# Altium PCB FPGA_Tester_Board.PcbDoc
Units mm, origin at the board's own origin, x right, y up, seen from the top; angles counter-clockwise.
Board outline 77 x 109 mm, 8 copper layers (Top Layer, Signal Layer 1, Signal Layer 2, Signal Layer 3, Signal Layer 4, Signal Layer 5, Signal Layer 6, Bottom Layer), stack 1.684 mm thick; 29 components, 84 nets, 252 pads, 29 vias.
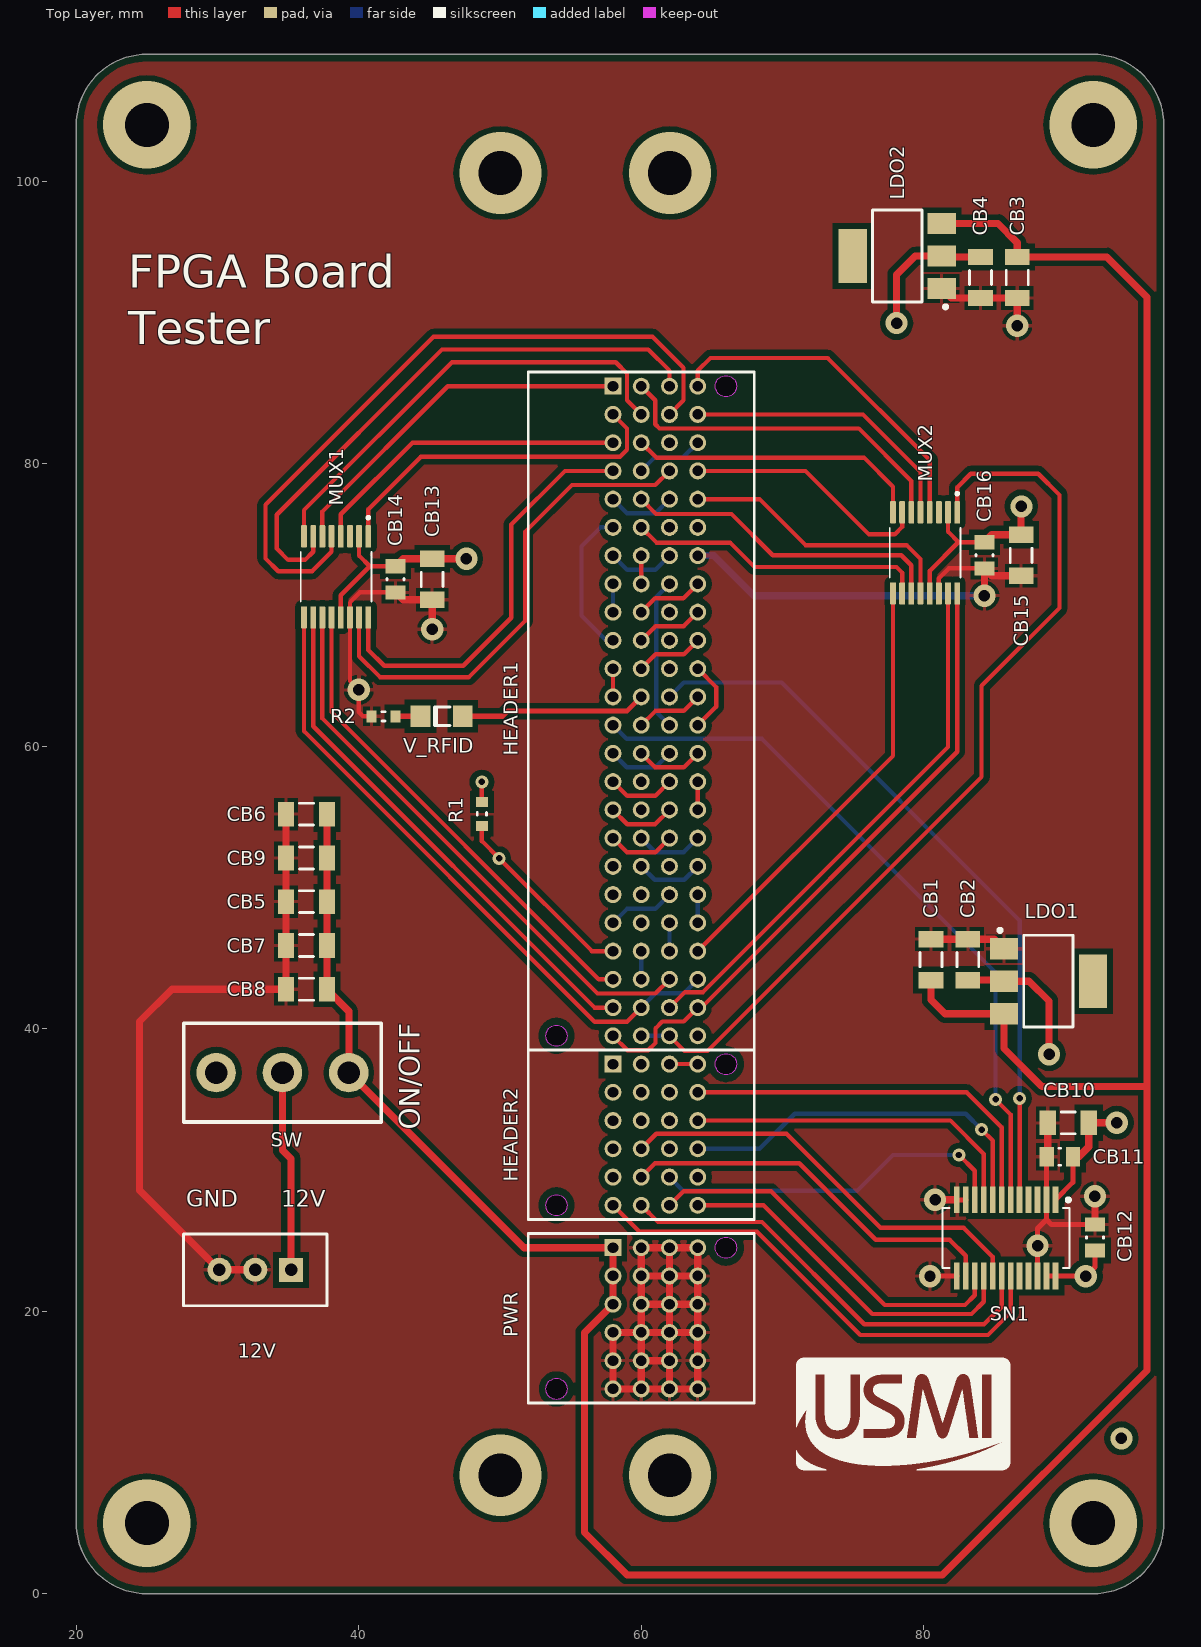
[diagram p0: Top Layer view]
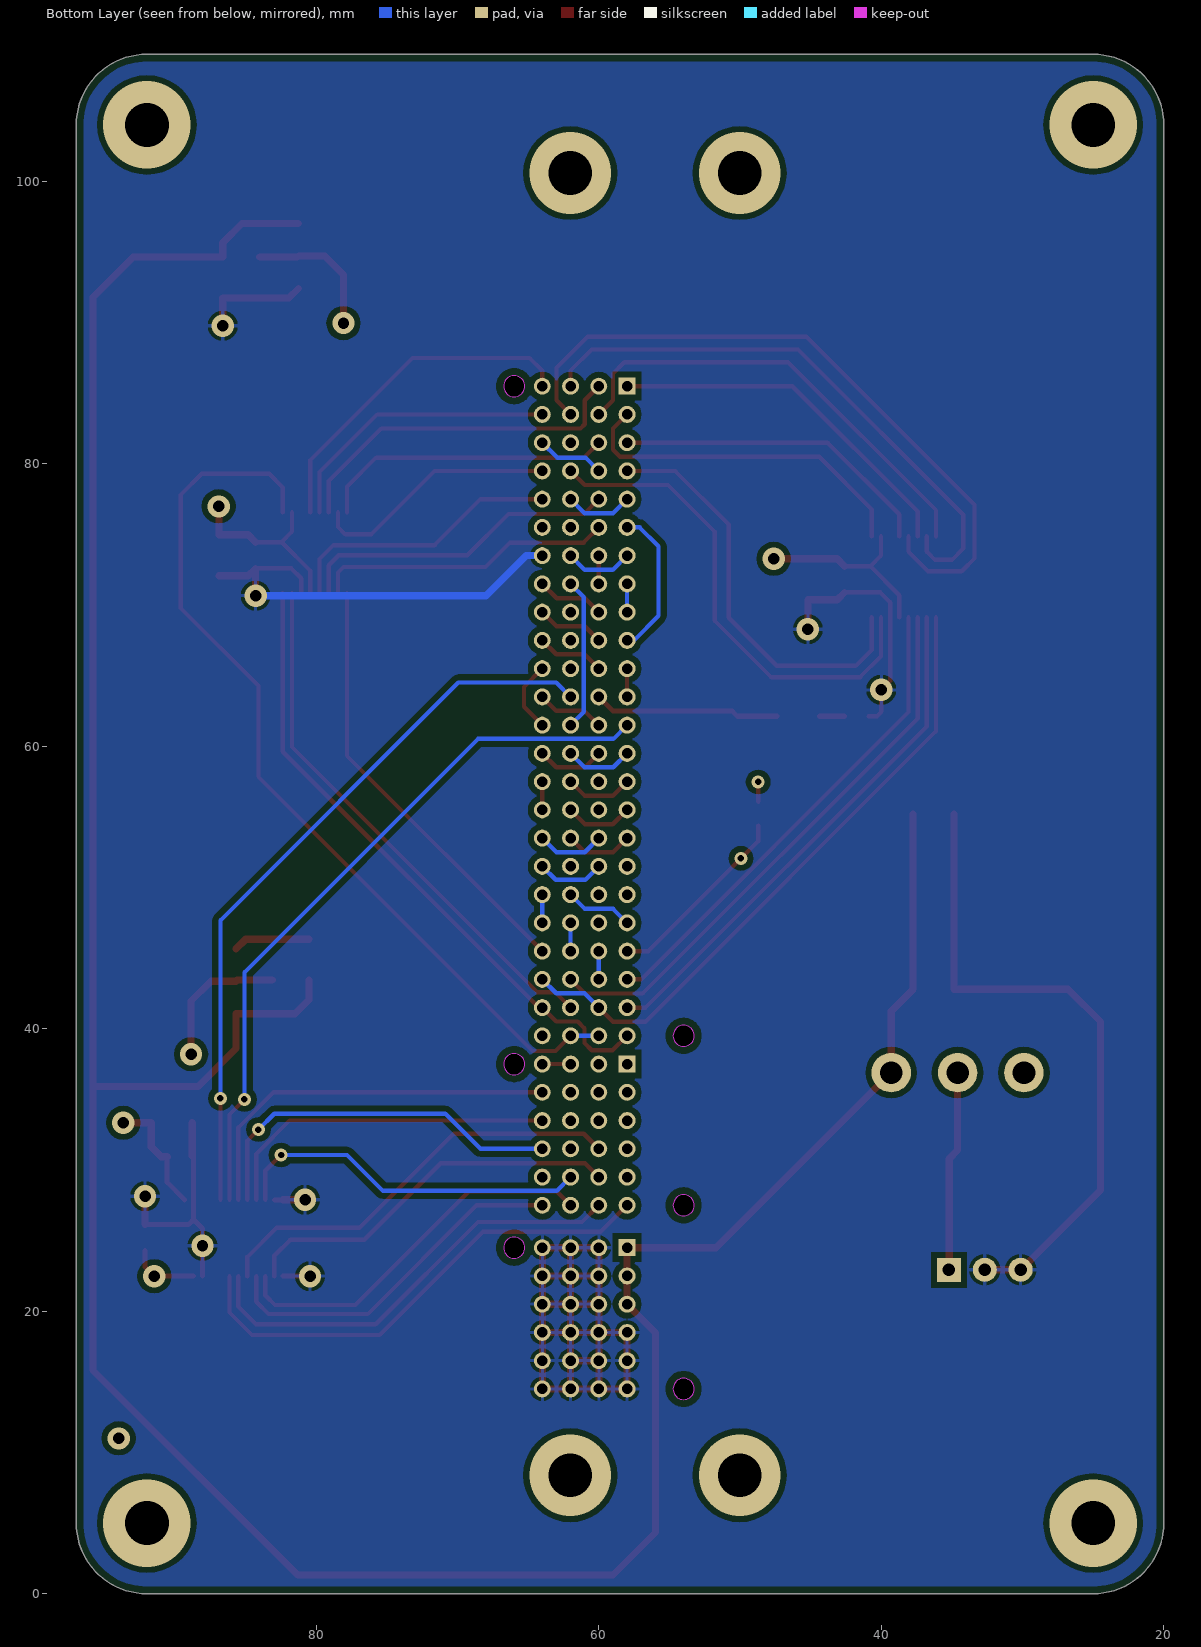
[diagram p1: Bottom Layer view, seen from below]
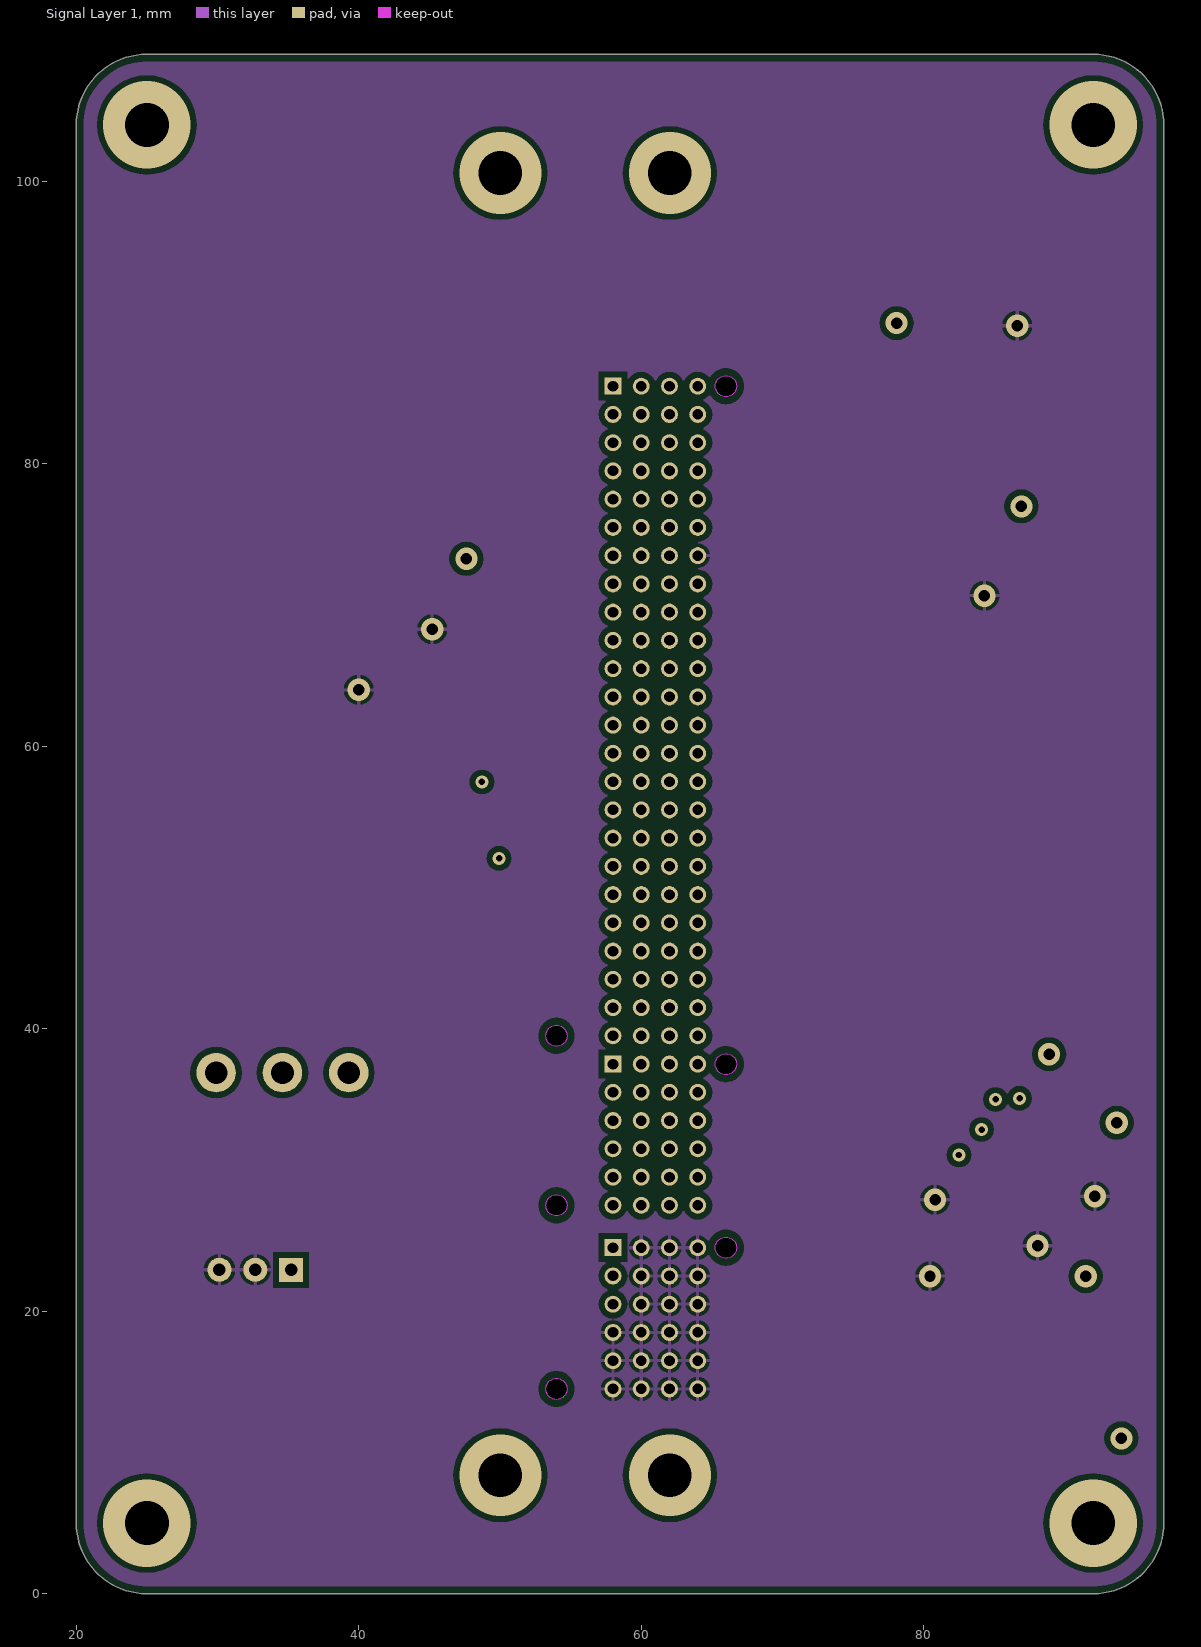
[diagram p2: Signal Layer 1]
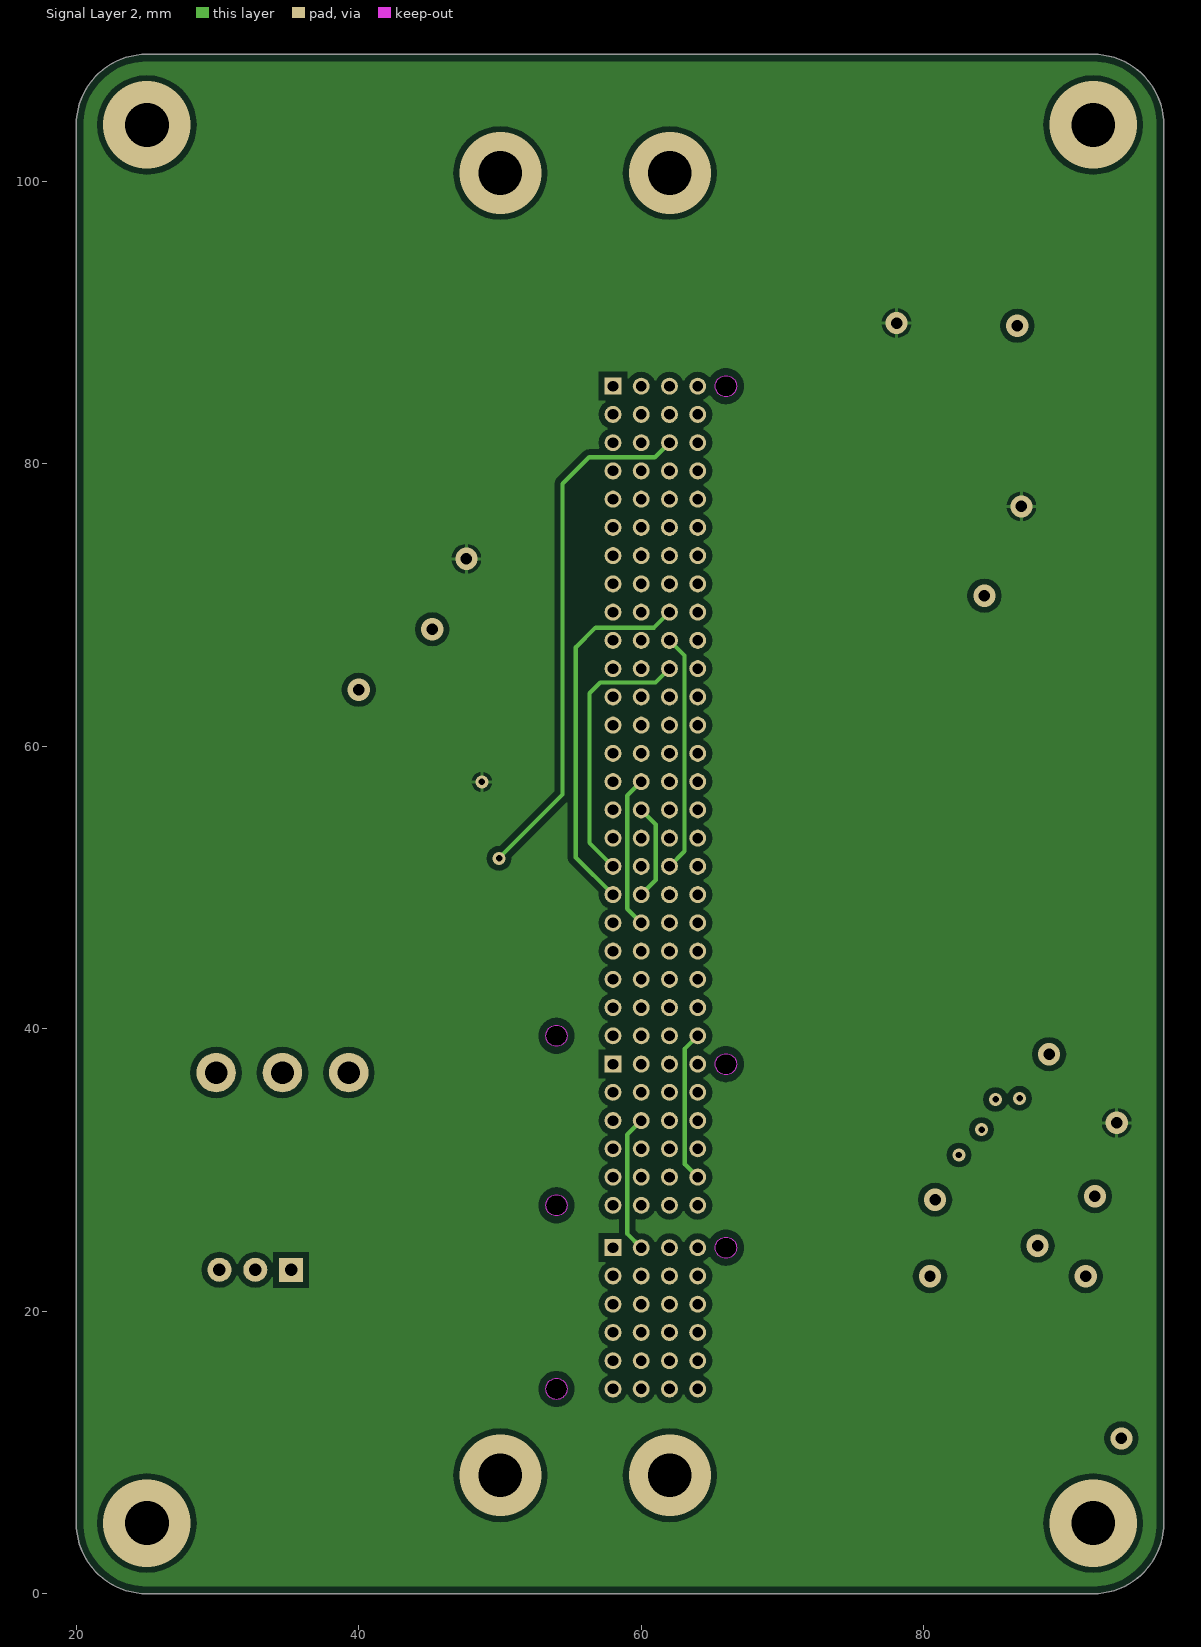
[diagram p3: Signal Layer 2]
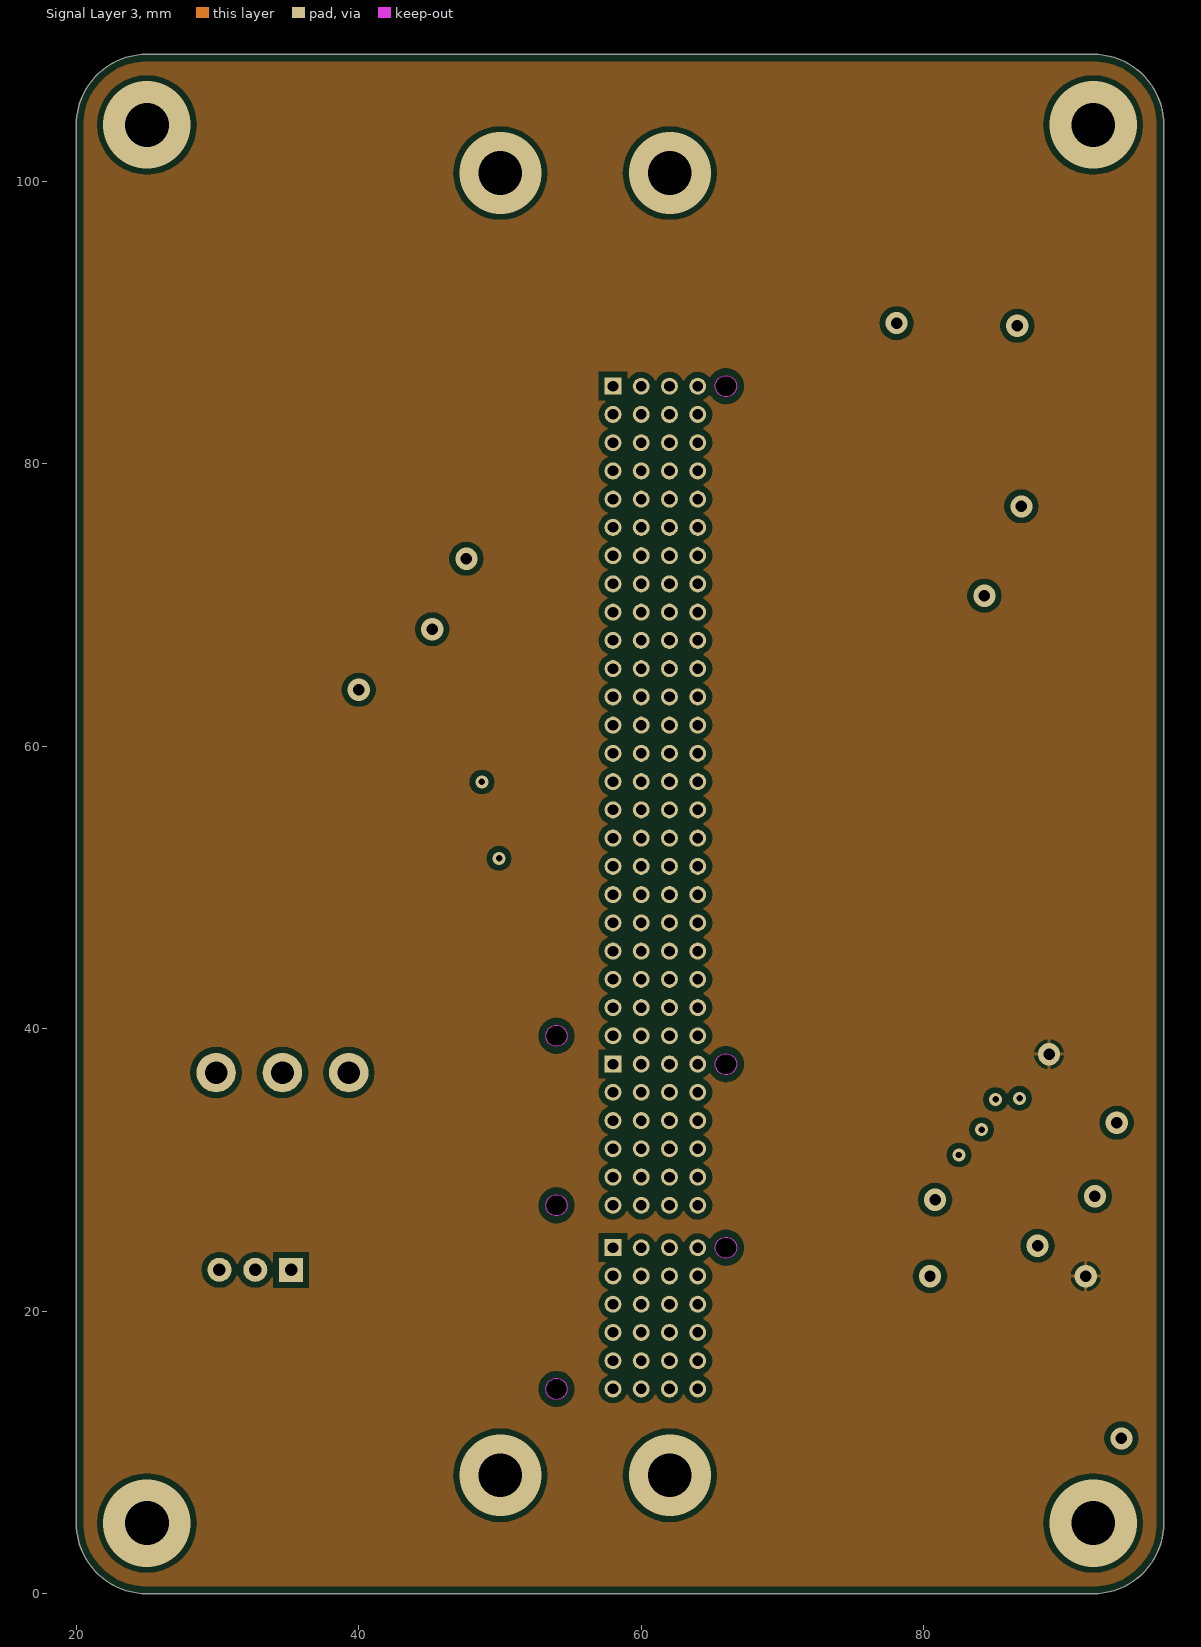
[diagram p4: Signal Layer 3]
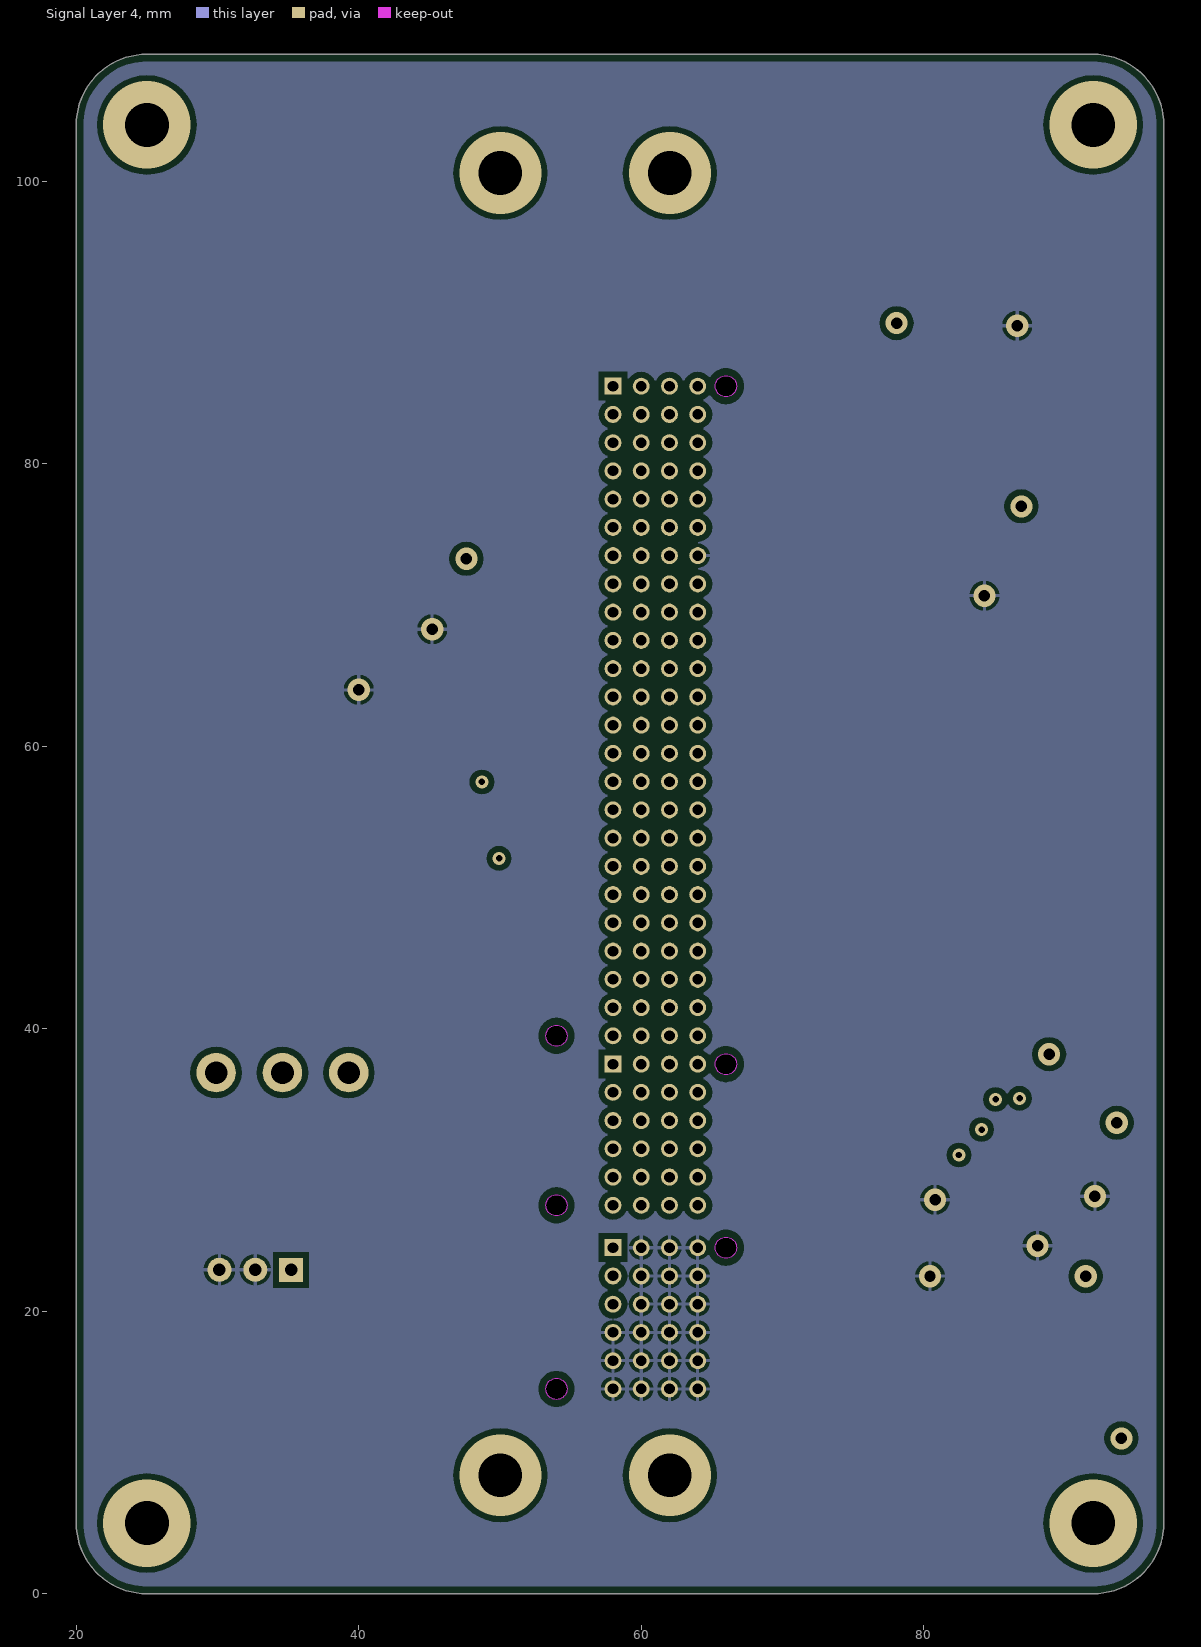
[diagram p5: Signal Layer 4]

## Layer stack, top to bottom
Top Solder: solder mask 0.0102, Solder Resist, Dk 3.5
Top Layer: signal copper 0.0356
Dielectric 1: core 0.254, FR-4, Dk 4.2
Signal Layer 1: signal copper 0.036
Dielectric 3: prepreg 0.127, Dk 4.2
Signal Layer 2: signal copper 0.036
Dielectric 4: core 0.254, Dk 4.2
Signal Layer 3: signal copper 0.036
Dielectric 5: prepreg 0.127, Dk 4.2
Signal Layer 4: signal copper 0.036
Dielectric 6: core 0.254, Dk 4.2
Signal Layer 5: signal copper 0.036
Dielectric 7: prepreg 0.127, Dk 4.2
Signal Layer 6: signal copper 0.036
Dielectric 2: core 0.254, Dk 4.2
Bottom Layer: signal copper 0.0356
Bottom Solder: solder mask 0.0102, Solder Resist, Dk 3.5

## Board outline
20,5 ccw(c25,5) 25,0 92,0 ccw(c92,5) 97,5 97,104 ccw(c92,104) 92,109 25,109 ccw(c25,104) 20,104

## Design rules (kind name [scope] priority, off if disabled: settings)
BoardOutlineClearance [All] p1: gap=0.508
Clearance [All] p1: gap=0.152 except(0.406: Arc-Poly Track-Poly SMDPad-Poly THPad-Poly Via-Poly Fill-Poly Poly-Poly)
HoleSize [All] p1: absolutevalues=TRUE maxlimit=3.5 minlimit=0.025 maxpercent=80.000 minpercent=20.000
MinimumSolderMaskSliver [All] p1: minsoldermaskwidth=0.034
PolygonConnect [All] p1: connectstyle=Relief reliefconductorwidth=0.254 reliefentries=4 polygonreliefangle="90 Angle" airgapwidth=0.254
RoomDefinition U_12V_to_5V_1A_LR_Sheet [InComponentClass('U_12V_to_5V_1A_LR_Sheet')] p1: confinementstyle=ConfineIn formatcopy=TRUE lockcomponents=FALSE outline 89.306,98.72 73.123,98.72 73.123,89.22 89.306,89.22
RoomDefinition U_12V_to_3_3V_1A_LR_Sheet [InComponentClass('U_12V_to_3_3V_1A_LR_Sheet')] p2: confinementstyle=ConfineIn formatcopy=TRUE lockcomponents=FALSE outline 77.826,39.37 93.831,39.37 93.831,48.26 77.826,48.26
RoomDefinition U_3V3_to_5V_8_bit_Logic_Converter [InComponentClass('U_3V3_to_5V_8_bit_Logic_Converter')] p3: confinementstyle=ConfineIn formatcopy=TRUE lockcomponents=FALSE outline 79.839,37.084 79.839,20.189 93.839,20.189 93.839,37.084
RoomDefinition MUX_8_TO_1_2 [InComponentClass('MUX_8_TO_1_2')] p4: confinementstyle=ConfineIn formatcopy=TRUE lockcomponents=FALSE outline 89.8,82.925 77.1,82.925 77.1,66.7 89.8,66.7
RoomDefinition MUX_8_TO_1_1 [InComponentClass('MUX_8_TO_1_1')] p5: confinementstyle=ConfineIn formatcopy=TRUE lockcomponents=FALSE outline 48.1,81.225 35.4,81.225 35.4,65 48.1,65
RoutingVias [All] p1: holewidth=0.457 width=0.914 viastyle="Through Hole" minholewidth=0.356 minwidth=0.813 maxholewidth=1.321 maxwidth=2.083
SilkToSolderMaskClearance [IsPad] p1: minsilkscreentomaskgap=0.1 clearancetoexposedcopper=TRUE
SolderMaskExpansion [All] p1: expansion=0.102
Width [All] p1: maxlimit=0.813 minlimit=0.254 preferedwidth=0.406
27 further rules are at their usual default settings.

## Classes and differential pairs
channel class Multiplexer_8_to_1: MUX_8_TO_1_1 MUX_8_TO_1_2
component class U_12V_to_5V_1A_LR_Sheet: CB3 CB4 LDO2
component class U_12V_to_3_3V_1A_LR_Sheet: CB1 CB2 LDO1
component class U_3V3_to_5V_8_bit_Logic_Converter: CB10 CB11 CB12 SN1
component class Power_Input: 12V CB5 CB6 CB7 CB8 CB9 PWR SW
component class MUX_8_TO_1_2: CB15 CB16 MUX2
component class MUX_8_TO_1_1: CB13 CB14 MUX1
component class FPGA_Tester_Board_Signals: HEADER1 HEADER2 R1 R2 V_RFID

## Components (designator, comment, footprint, x,y, rotation, side; value= is the part's Value field where it differs from the comment)
12V "Header 3" HDR1X3_12V 32.674,22.936 r180 top
CB1 "10uF" 1206c 80.523,44.895 r90 top
CB2 "10uF" 1206c 83.127,44.895 r90 top
CB3 "10uF" 1206c 86.627,93.195 r270 top (schematic designator CB1)
CB4 "10uF" 1206c 84.023,93.195 r270 top (schematic designator CB2)
CB5 "10uF" 1206c 36.296,49 r0 top
CB6 "10uF" 1206c 36.296,55.2 r0 top (schematic designator CB4)
CB7 "10uF" 1206c 36.296,45.9 r0 top (schematic designator CB1)
CB8 "10uF" 1206c 36.296,42.8 r0 top (schematic designator CB2)
CB9 "10uF" 1206c 36.296,52.1 r0 top (schematic designator CB3)
CB10 "10uF" 1206c 90.237,33.341 r0 top (schematic designator CB3)
CB11 "100nF" 0805c 89.637,30.937 r0 top (schematic designator CB1)
CB12 "100nF" 0805c 92.126,25.222 r270 top (schematic designator CB2)
CB13 "10uF" 1206c 45.2,71.825 r90 top (schematic designator CB3)
CB14 "100nF" 0805c 42.6,71.825 r90 top (schematic designator CB1)
CB15 "10uF" 1206c 86.9,73.525 r90 top (schematic designator CB3)
CB16 "100nF" 0805c 84.3,73.525 r90 top (schematic designator CB1)
HEADER1 "5536507-3" 5536501-3 58,85.5 r0 top locked
HEADER2 "5536507-1" 5536501-1 58,37.5 r0 top locked
LDO1 "NCP1117LPST33T3G" ONSC-SOT-223-4-318H-01_A_V 88.831,43.37 r0 top (schematic designator LDO)
LDO2 "LDL1117S50R" ONSC-SOT-223-4-318H-01_A_V 78.123,94.72 r180 top (schematic designator LDO)
MUX1 "TMUX1208PWR" SOP65P640X120-16N 38.4,72 r270 top (schematic designator MUX)
MUX2 "TMUX1208PWR" SOP65P640X120-16N 80.1,73.7 r270 top (schematic designator MUX)
PWR "5536623-1" 5536623-1 58,14.5 r0 top locked
R1 "2.2K" 0603R 48.717,55.22 r90 top
R2 "2.2K" 0603R 41.758,62.128 r0 top
SN1 "SN74LVC8T" DBQ24-M 85.839,25.189 r270 top (schematic designator SN74LV)
SW "SW" CS12ANW03 34.6,36.9 r180 top
V_RFID "RED" 1206_A 45.872,62.128 r0 top

## Footprints (in the part's own frame and the unit in brackets; to place one, negate y for a bottom-side part, rotate by r counter-clockwise, add the part's x,y. Pads: shape width x height; smd on the part's side, far side on the other; paste and mask are expansions set on the pad)
0603R [mm]
  rect 0.7x0.85 smd: 1(-0.85,0) 2(0.85,0)
  silkscreen extent -0.1,-0.33 0.1,0.33, body extent -0.8,-0.4 0.8,0.4, height 0.6
0805c [mm] "Chip Capacitor, 2-Leads, Body 2.00x1.25mm, IPC Medium Density"
  rect 1x1.4 smd: 1(-0.925,0) 2(0.925,0)
  silkscreen extent -0.05,-0.6 0.05,0.6, body extent -1,-0.63 1,0.63, height 1.35
1206_A [mm] "Chip LED, 2-Leads, Body 3.2x1.6mm, IPC Medium Density"
  rect 1.4x1.5 smd: 1(-1.5,0) 2(1.5,0)
  silkscreen extent -0.5,-0.66 0.6,0.65, body extent -1.6,-0.8 1.6,0.8, height 0.68
1206c [mm] "Chip Capacitor, 2-Leads, Body 3.20x1.60mm, IPC Medium Density"
  rect 1.15x1.75 smd: 1(-1.45,0) 2(1.45,0)
  silkscreen extent -0.5,-0.77 0.5,0.77, body extent -1.6,-0.8 1.6,0.8, height 1.4
5536501-1 [mm] "TE Z-Pack 5536501"
  rect 1.2x1.2 hole 0.75: 1(0,0)
  round 1.2 hole 0.75: 2(2,0) 3(4,0) 4(6,0) 5(0,-2) 6(2,-2) 7(4,-2) 8(6,-2) 9(0,-4) 10(2,-4) 11(4,-4) 12(6,-4) 13(0,-6) 14(2,-6) 15(4,-6) 16(6,-6) 17(0,-8) 18(2,-8) 19(4,-8) 20(6,-8) 21(0,-10) 22(2,-10) 23(4,-10) 24(6,-10)
  Keep-Out Layer board cut-out: 8,-0.75 7.713,-0.693 7.47,-0.53 7.307,-0.287 7.25,0 7.25,0 7.307,0.287 7.47,0.53 7.713,0.693 8,0.75 8,0.75 8.287,0.693 8.53,0.53 8.693,0.287 8.75,0 8.75,0 8.693,-0.287 8.53,-0.53 8.287,-0.693 8,-0.75
  Keep-Out Layer board cut-out: -4,-10.75 -4.287,-10.693 -4.53,-10.53 -4.693,-10.287 -4.75,-10 -4.75,-10 -4.693,-9.713 -4.53,-9.47 -4.287,-9.307 -4,-9.25 -4,-9.25 -3.713,-9.307 -3.47,-9.47 -3.307,-9.713 -3.25,-10 -3.25,-10 -3.307,-10.287 -3.47,-10.53 -3.713,-10.693 -4,-10.75
  silkscreen extent -6,-11 10,1, body extent -5.75,-10.94 10.05,0.94, height 17
5536501-3 [mm] "TE Z-Pack 5536501-3"
  rect 1.2x1.2 hole 0.75: 1(0,0)
  round 1.2 hole 0.75: 2(2,0) 3(4,0) 4(6,0) 5(0,-2) 6(2,-2) 7(4,-2) 8(6,-2) 9(0,-4) 10(2,-4) 11(4,-4) 12(6,-4) 13(0,-6) 14(2,-6) 15(4,-6) 16(6,-6) 17(0,-8) 18(2,-8) 19(4,-8) 20(6,-8) 21(0,-10) 22(2,-10) 23(4,-10) 24(6,-10) 25(0,-12) 26(2,-12) 27(4,-12) 28(6,-12) 29(0,-14) 30(2,-14) 31(4,-14) 32(6,-14) 33(0,-16) 34(2,-16) 35(4,-16) 36(6,-16) 37(0,-18) 38(2,-18) 39(4,-18) 40(6,-18) 41(0,-20) 42(2,-20) 43(4,-20) 44(6,-20) 45(0,-22) 46(2,-22) 47(4,-22) 48(6,-22) 49(0,-24) 50(2,-24) 51(4,-24) 52(6,-24) 53(0,-26) 54(2,-26) 55(4,-26) 56(6,-26) 57(0,-28) 58(2,-28) 59(4,-28) 60(6,-28) 61(0,-30) 62(2,-30) 63(4,-30) 64(6,-30) 65(0,-32) 66(2,-32) 67(4,-32) 68(6,-32) 69(0,-34) 70(2,-34) 71(4,-34) 72(6,-34) 73(0,-36) 74(2,-36) 75(4,-36) 76(6,-36) 77(0,-38) 78(2,-38) 79(4,-38) 80(6,-38) 81(0,-40) 82(2,-40) 83(4,-40) 84(6,-40) 85(0,-42) 86(2,-42) 87(4,-42) 88(6,-42) 89(0,-44) 90(2,-44) 91(4,-44) 92(6,-44) 93(0,-46) 94(2,-46) 95(4,-46) 96(6,-46)
  Keep-Out Layer board cut-out: -4,-46.75 -4.287,-46.693 -4.53,-46.53 -4.693,-46.287 -4.75,-46 -4.75,-46 -4.693,-45.713 -4.53,-45.47 -4.287,-45.307 -4,-45.25 -4,-45.25 -3.713,-45.307 -3.47,-45.47 -3.307,-45.713 -3.25,-46 -3.25,-46 -3.307,-46.287 -3.47,-46.53 -3.713,-46.693 -4,-46.75
  Keep-Out Layer board cut-out: 8,-0.75 7.713,-0.693 7.47,-0.53 7.307,-0.287 7.25,0 7.25,0 7.307,0.287 7.47,0.53 7.713,0.693 8,0.75 8,0.75 8.287,0.693 8.53,0.53 8.693,0.287 8.75,0 8.75,0 8.693,-0.287 8.53,-0.53 8.287,-0.693 8,-0.75
  silkscreen extent -6,-47 10,1, body extent -5.75,-46.94 10.05,0.94, height 17
5536623-1 [mm] "TE Z-Pack 5536623-1"
  round 1.2 hole 0.75: 1(0,6) 1(0,8) 2(2,6) 2(2,8) 2(2,10) 3(4,6) 3(4,8) 3(4,10) 4(6,6) 4(6,8) 4(6,10) 5(0,0) 5(0,2) 5(0,4) 6(2,0) 6(2,2) 6(2,4) 7(4,0) 7(4,2) 7(4,4) 8(6,0) 8(6,2) 8(6,4)
  rect 1.2x1.2 hole 0.75: 1(0,10)
  Keep-Out Layer board cut-out: -4,-0.75 -4.287,-0.693 -4.53,-0.53 -4.693,-0.287 -4.75,0 -4.75,0 -4.693,0.287 -4.53,0.53 -4.287,0.693 -4,0.75 -4,0.75 -3.713,0.693 -3.47,0.53 -3.307,0.287 -3.25,0 -3.25,0 -3.307,-0.287 -3.47,-0.53 -3.713,-0.693 -4,-0.75
  Keep-Out Layer board cut-out: 8,9.25 7.713,9.307 7.47,9.47 7.307,9.713 7.25,10 7.25,10 7.307,10.287 7.47,10.53 7.713,10.693 8,10.75 8,10.75 8.287,10.693 8.53,10.53 8.693,10.287 8.75,10 8.75,10 8.693,9.713 8.53,9.47 8.287,9.307 8,9.25
  silkscreen extent -6,-1 10,11, body extent -5.95,-0.92 9.9,10.96, height 17
CS12ANW03 [mm] "NKK Switches SPDT Switch"
  round 2.8 hole 1.6: 1(-4.7,0) 2(0,0) 3(4.7,0)
  silkscreen extent -7,-3.5 7,3.5
DBQ24-M [mil] "24-SSOP (0.154\", 3.90mm Width)"
  rect 75x16 smd paste+0 mask+0: 1(-106.5,137.5) 2(-106.5,112.5) 3(-106.5,87.5) 4(-106.5,62.5) 5(-106.5,37.5) 6(-106.5,12.5) 7(-106.5,-12.5) 8(-106.5,-37.5) 9(-106.5,-62.5) 10(-106.5,-87.5) 11(-106.5,-112.5) 12(-106.5,-137.5) 13(106.5,-137.5) 14(106.5,-112.5) 15(106.5,-87.5) 16(106.5,-62.5) 17(106.5,-37.5) 18(106.5,-12.5) 19(106.5,12.5) 20(106.5,37.5) 21(106.5,62.5) 22(106.5,87.5) 23(106.5,112.5) 24(106.5,137.5)
  silkscreen extent -110,-177 84,177, body extent -122,-172 122,172, height 67
HDR1X3_12V [mm]
  rect 1.7x1.7 hole 0.89: 1(-2.54,0)
  round 1.7 hole 0.89: 2(0,0) 3(2.54,0)
  silkscreen extent -5.08,-2.54 5.08,2.54
ONSC-SOT-223-4-318H-01_A_V [mm] "SOT223, 4-Leads, Body 6.5x3.5mm, Pitch 2.3mm"
  rect 2x1.5 smd: 1(-3.15,2.3) 2(-3.15,0) 3(-3.15,-2.3)
  rect 2x3.8 smd: 4(3.15,0)
  silkscreen extent -3.55,-3.25 1.75,3.72, body extent -1.75,-3.25 1.75,3.25, height 1.8
SOP65P640X120-16N [mm]
  rrect25% 1.57x0.41 smd: 1(-2.87,2.275) 2(-2.87,1.625) 3(-2.87,0.975) 4(-2.87,0.325) 5(-2.87,-0.325) 6(-2.87,-0.975) 7(-2.87,-1.625) 8(-2.87,-2.275) 9(2.87,-2.275) 10(2.87,-1.625) 11(2.87,-0.975) 12(2.87,-0.325) 13(2.87,0.325) 14(2.87,0.975) 15(2.87,1.625) 16(2.87,2.275)
  silkscreen extent -4.29,-2.5 1.77,2.5

## Part data
12V: "Header, 3-Pin"
CB1 CB2 CB3 CB4 CB5 CB6 CB7 CB8 CB9 CB10 CB11 CB12 CB13 CB14 CB15 CB16: library part Cap, "Capacitor"
HEADER1: "TE Z-Pack 5536507-3"
HEADER2: "TE Z-Pack 5536507-1"
LDO1 LDO2: library part CMP-1679-00010-1, "Low-Dropout Positive Fixed Voltage Regulator, 1 A, 3.3 V Output Voltage, 0 to 125 degC, 4-Pin SOT-223 (318H-01), Pb-Free, Tape and Reel"
MUX1 MUX2: "5-V, 8:1, 1-channel general-purpose analog multiplexer with 1.8-V input logic 16-TSSOP -40 to 125"
PWR: library part 5536607-1, "TE Z-Pack 5536607-1"
R1 R2: library part Res1, "Resistor"
SW: library part SW-SPDT, "SPDT Subminiature Toggle Switch, Right Angle Mounting, Vertical Actuation"
V_RFID: library part CMP-1426-00017-1, "SMD mono-color Chip LED, WL-SMCW, Super Red"

## Via types
v1: diameter 1.575, hole 0.813, Top Layer to Bottom Layer, tented both sides, 15 vias
v2: diameter 0.914, hole 0.457, Top Layer to Bottom Layer, tented both sides, 6 vias
v3: diameter 6.2, hole 3.1, Top Layer to Bottom Layer, tented both sides, 4 vias
v4: diameter 5.8, hole 3.1, Top Layer to Bottom Layer, tented both sides, 4 vias

## Nets (pads, with @x,y where several pads share a name; then routed paths per layer and width w, separated by ;. In a path a pad name is that pad's centre, name@x,y a point inside that pad or via, vN(x,y) a via of type N, cw(c..) or ccw(c..) an arc to the next point about the centre after c; other vN are vias at no path point)
3V3: CB2.1 CB12.2 LDO1.2 SN1.23 SN1.24 | length 14.9
  Top Layer w0.356: SN1.23 SN1.24 v1(91.471,22.484) 92.126,23.139 CB12.2
  Top Layer w0.508: CB2.1 LDO1.2@85.606,43.445 ; LDO1.2 87.465,43.37 88.875,41.961 v1(88.875,38.202)
5V: CB4.1 CB10.2 CB11.2 CB13.2 CB14.2 CB15.2 CB16.2 LDO2.2 MUX1.2 MUX1.13 MUX2.2 MUX2.13 R1.2 SN1.1 | length 47.5
  Top Layer w0.305: MUX1.13 38.725,70.7 40.775,72.75 ; MUX1.2 40.025,73.5 40.775,72.75 ; CB14.2 40.775,72.75 ; R1.2 v2(48.717,57.48) ; MUX2.13 80.425,72.424 82.451,74.45 82.475,74.45 ; MUX2.2 81.725,75.2 82.475,74.45 ; CB16.2 82.475,74.45
  Top Layer w0.356: SN1.1 90.562,29.125 CB11.2
  Top Layer w0.508: CB14.2 43.125,73.275 CB13.2 v1(47.621,73.275) v1@47.625,73.279 ; v1(78.08,89.967) 78.08,93.396 79.404,94.72 LDO2.2 ; LDO2.2@81.348,94.645 CB4.1 ; CB16.2 84.825,74.975 CB15.2 86.9,77.006 v1(86.919,76.987) ; CB11.2 90.983,30.937 91.687,31.641 CB10.2 v1(93.666,33.341)
12V: CB1.1 CB3.1 CB5.2 CB6.2 CB7.2 CB8.2 CB9.2 LDO1.3 LDO2.3 PWR.1 SW.1 | length 224.8
  Top Layer w0.508: CB6.2 CB9.2 CB5.2 CB7.2 CB8.2 39.3,41.246 SW.1 51.7,24.5 58,24.5 58,22.5 58,20.5 55.982,18.482 55.982,4.343 59.004,1.321 81.321,1.321 95.809,15.809 95.809,35.916 ; CB1.1 80.523,42.058 81.51,41.07 LDO1.3 85.681,38.601 88.367,35.916 95.809,35.916 ; LDO2.3 85.266,97.02 86.627,95.658 CB3.1 92.96,94.645 95.809,91.796 95.809,35.916
"12V U/OVD": HEADER1.61 HEADER1.63 | length 4.8
  Top Layer w0.305: HEADER1.61 59.017,54.483 60.983,54.483 HEADER1.63
ADC_CLK_FPGA: HEADER1.89 MUX1.10 | length 37.2
  Top Layer w0.305: MUX1.10 36.775,61.425 56.7,41.501 HEADER1.89
ADC_CS_FPGA: HEADER1.92 HEADER1.93 MUX2.16 | length 45.4
  Top Layer w0.305: HEADER1.93 58.01,39.501 59.03,38.481 60.502,38.481 61.011,38.99 61.011,40.03 61.493,40.513 63.013,40.513 HEADER1.92 64.259,41.501 82.375,59.617 MUX2.16
ADC_CSN_FPGA: HEADER1.40 HEADER1.42 | length 4.8
  Top Layer w0.305: HEADER1.42 61.022,66.523 63.022,66.523 HEADER1.40
ADC_SCLK_FPGA: HEADER1.41 HEADER1.45 | length 2
  Top Layer w0.305: HEADER1.45 HEADER1.41
ADC_SDATA_CUR: HEADER1.88 HEADER1.90 MUX1.9 | length 45.7
  Top Layer w0.305: MUX1.9 36.125,61.075 56.7,40.5 59,40.5 HEADER1.90
  Bottom Layer w0.305: HEADER1.90 61.019,42.52 63.019,42.52 HEADER1.88
ADC_SDATA_CUR_BI_FPGA: HEADER1.21 HEADER1.37 | length 10.6
  Bottom Layer w0.305: HEADER1.37 57.518,67.501 55.778,69.24 55.778,74.168 57.111,75.5 HEADER1.21
ADC_SDATA_CUR_FPGA: HEADER1.29 HEADER1.33 | length 2
  Bottom Layer w0.305: HEADER1.33 HEADER1.29
ADC_SDATA_VOT: HEADER1.94 HEADER1.95 MUX2.1 | length 64.9
  Top Layer w0.305: HEADER1.95 63.07,38.43 64.694,38.43 84.099,57.836 84.099,64.287 89.611,69.799 89.611,77.8 88.113,79.299 83.337,79.299 82.375,78.336 MUX2.1
  Bottom Layer w0.305: HEADER1.94 HEADER1.95
ADC_SDATA_VOT_BI_FPGA: HEADER1.32 HEADER1.34 | length 4.8
  Top Layer w0.305: HEADER1.34 60.985,70.485 62.985,70.485 HEADER1.32
ADC_SDATA_VOT_FPGA: HEADER1.36 HEADER1.38 | length 4.8
  Top Layer w0.305: HEADER1.38 61.003,68.504 63.003,68.504 HEADER1.36
AUDIO_ENABLE: HEADER2.17
BI_DRV_ACT: HEADER1.84 MUX2.9 | length 31.1
  Top Layer w0.305: HEADER1.84 77.825,59.326 MUX2.9
CAL_10: HEADER1.22 MUX2.10 | length 21.3
  Top Layer w0.305: HEADER1.22 61.079,74.422 66.294,74.422 68.021,72.695 78.08,72.695 78.475,72.299 MUX2.10
CAL_100: HEADER1.18 MUX2.11 | length 23.1
  Top Layer w0.305: HEADER1.18 61.047,76.454 66.396,76.454 69.317,73.533 78.41,73.533 79.125,72.818 MUX2.11
"CAP DIS": HEADER1.62 HEADER1.74 | length 6.9
  Signal Layer 2 w0.305: HEADER1.74 61.036,50.537 61.036,54.464 HEADER1.62
CR_PG_FPGA: HEADER1.76 HEADER1.80 | length 2
  Bottom Layer w0.305: HEADER1.80 HEADER1.76
CS_N: HEADER1.7 MUX1.5 | length 49.7
  Top Layer w0.305: MUX1.5 38.075,73.775 36.7,72.4 34.3,72.4 33.4,73.3 33.4,77.1 45.3,89 60.8,89 63,86.8 63,84.5 HEADER1.7
DATA_IN: HEADER1.65 HEADER1.67 | length 4.8
  Top Layer w0.305: HEADER1.65 58.999,52.502 61.001,52.502 HEADER1.67
"EEPROM _CLK": HEADER1.85 MUX1.12 | length 34.5
  Top Layer w0.305: MUX1.12 38.075,62.425 56.999,43.5 HEADER1.85
EEPROM-SCLK: HEADER1.12 HEADER1.14 | length 4.8
  Bottom Layer w0.305: HEADER1.14 60.941,80.442 62.941,80.442 HEADER1.12
EEPROM-SDATA: HEADER1.11 HEADER1.81 R1.1 | length 50.7
  Top Layer w0.305: R1.1 48.717,53.289 v2(49.936,52.07) 56.506,45.501 HEADER1.81
  Signal Layer 2 w0.305: v2(49.936,52.07) 49.936,52.095 54.432,56.591 54.432,78.588 56.312,80.467 60.967,80.467 HEADER1.11
EN: HEADER1.25 HEADER1.27 | length 4.8
  Bottom Layer w0.305: HEADER1.25 59.009,72.492 60.991,72.492 HEADER1.27
"FAN LOAD SWITCH": HEADER1.31 HEADER1.51 | length 10.8
  Bottom Layer w0.305: HEADER1.51 61.062,62.439 61.062,70.562 HEADER1.31
"FPGA EN/SS": HEADER1.66 HEADER1.68 | length 4.8
  Bottom Layer w0.305: HEADER1.66 60.999,52.502 63.001,52.502 HEADER1.68
GM_DIN: HEADER1.8 MUX2.5 | length 20.3
  Top Layer w0.305: HEADER1.8 75.7,83.5 79.775,79.425 MUX2.5
GM_DOUT: HEADER1.6 MUX1.8 | length 32.7
  Top Layer w0.305: MUX1.8 36.125,76.725 46.6,87.2 58.2,87.2 59,86.4 59,84.501 HEADER1.6
GND: 12V.2 12V.3 CB1.2 CB2.2 CB3.2 CB4.2 CB5.1 CB6.1 CB7.1 CB8.1 CB9.1 CB10.1 CB11.1 CB12.1 CB13.1 CB14.1 CB15.1 CB16.1 HEADER1.28 HEADER2.10 LDO1.1 LDO2.1 MUX1.14 MUX2.14 PWR.2 PWR.3 PWR.4 PWR.5 PWR.6 PWR.7 PWR.8 R2.1 SN1.2 SN1.11 SN1.12 SN1.13 SN1.22 | length 198.2
  Top Layer w0.305: R2.1 40.31,62.128 40,62.438 v1(40,64) 39.375,64.625 MUX1.14 39.375,70.2 40.075,70.9 CB14.1 ; MUX2.14 81.075,71.9 81.775,72.6 CB16.1
  Top Layer w0.356: v1(80.447,22.484) SN1.13 ; SN1.12 SN1.11 ; SN1.22 v1(88.062,24.638) 88.062,25.859 88.696,26.493 ; CB11.1@88.696,30.922 SN1.2 88.696,26.493 ; CB12.1 89.042,26.147 88.696,26.493
  Top Layer w0.508: 12V.2@32.655,22.936 30.115,22.936 24.486,28.566 24.486,40.513 26.773,42.8 CB8.1 CB7.1 CB5.1 CB9.1 CB6.1 ; CB14.1 43.125,70.375 CB13.1 v1(45.2,68.289) v1@45.085,68.174 ; CB1.2 CB2.2 85.006,46.345 LDO1.1 ; v1(80.803,27.894) SN1.12 ; LDO2.1 81.948,91.745 CB4.2 CB3.2 v1(86.627,89.776) v1@86.639,89.764 ; v1@84.303,70.663 v1(84.3,70.665) CB16.1 84.825,72.075 CB15.1 ; CB11.1@88.787,31.012 CB10.1 ; CB12.1 v1(92.126,28.143) ; PWR.6@60,14.5 PWR.6@60,16.5 ; PWR.6@60,14.5 PWR.7@62,14.5 ; PWR.6@60,14.5 58,14.5 58,16.5 58,18.5 PWR.6@60,18.5 ; PWR.6@60,16.5 PWR.7@62,16.5 ; PWR.6@60,16.5 PWR.6@60,18.5 ; PWR.6@60,18.5 PWR.2@60,20.5 ; PWR.6@60,18.5 PWR.7@62,18.5 ; PWR.2@60,20.5 PWR.3@62,20.5 ; PWR.2@60,20.5 PWR.2@60,22.5 ; PWR.2@60,22.5 PWR.3@62,22.5 ; PWR.2@60,22.5 60,24.5 PWR.3@62,24.5 ; PWR.7@62,14.5 PWR.7@62,16.5 ; PWR.7@62,14.5 64,14.5 64,16.5 PWR.8@64,18.5 ; PWR.7@62,16.5 PWR.7@62,18.5 ; PWR.7@62,18.5 PWR.3@62,20.5 ; PWR.7@62,18.5 PWR.8@64,18.5 ; PWR.3@62,20.5 PWR.4@64,20.5 ; PWR.3@62,20.5 PWR.3@62,22.5 ; PWR.3@62,22.5 PWR.4@64,22.5 ; PWR.3@62,22.5 PWR.3@62,24.5 ; PWR.3@62,24.5 64,24.5 PWR.4@64,22.5 ; PWR.8@64,18.5 PWR.4@64,20.5 ; PWR.4@64,20.5 PWR.4@64,22.5
  Signal Layer 2 w0.305: PWR.2@60,24.5 59.004,25.496 59.004,32.504 HEADER2.10
  Bottom Layer w0.508: HEADER1.28 65.158,73.501 67.993,70.665 v1(84.3,70.665)
GUI_UART_RX: HEADER2.3 HEADER2.4 | length 2
  Top Layer w0.305: HEADER2.3 HEADER2.4
"I/P AC U/OVD": HEADER1.54 HEADER1.56 | length 4.8
  Top Layer w0.305: HEADER1.54 60.979,58.522 63.021,58.522 HEADER1.56
I_THRESHOLD: HEADER1.79 HEADER1.83 | length 2
  Bottom Layer w0.305: HEADER1.83 HEADER1.79
LEDG: HEADER1.39 HEADER1.71 | length 16.9
  Signal Layer 2 w0.305: HEADER1.71 63.068,52.569 63.068,66.432 HEADER1.39
"LOAD SWITCH IP": HEADER1.44 HEADER1.52 | length 5.1
  Top Layer w0.305: HEADER1.52 65.303,62.804 65.303,64.197 HEADER1.44
Net12V_1: 12V.1 SW.2 | length 14.2
  Top Layer w0.508: SW.2 34.6,31.4 35.195,30.805 12V.1@35.195,22.936
NetR2_2: R2.2 V_RFID.1 | length 1.8
  Top Layer w0.356: R2.2 V_RFID.1
NetSN1_3: SN1.3
NetSN1_4: SN1.4
NetSN1_20: SN1.20
NetSN1_21: SN1.21
"OCP READER": HEADER1.57 HEADER1.59 | length 4.8
  Top Layer w0.305: HEADER1.57 59.011,56.49 60.989,56.49 HEADER1.59
"PFC INRUSH RELAY": HEADER1.58 HEADER1.78 | length 10.8
  Signal Layer 2 w0.305: HEADER1.78 59.004,48.496 59.004,56.505 HEADER1.58
"PFC ON/OFF RLY": HEADER1.53 HEADER1.55 | length 4.8
  Bottom Layer w0.305: HEADER1.53 58.979,58.522 61.021,58.522 HEADER1.55
PFC_SPARE_1: HEADER2.7
"POWER GOOD": HEADER1.82 HEADER1.86 | length 2
  Bottom Layer w0.305: HEADER1.86 HEADER1.82
PPM_CLK: HEADER1.26 HEADER1.30 | length 2
  Top Layer w0.305: HEADER1.30 HEADER1.26
PPM_CS: HEADER1.13 MUX1.16 | length 29.7
  Top Layer w0.305: MUX1.16 40.675,66.825 41.8,65.7 47.4,65.7 50.8,69.1 50.8,75.7 54.601,79.5 HEADER1.13
PPM_SDATA: HEADER1.17 HEADER1.19 | length 4.8
  Bottom Layer w0.305: HEADER1.17 58.996,76.505 61.004,76.505 HEADER1.19
PV1-D-PK-A: HEADER1.2 MUX2.6 | length 25.1
  Top Layer w0.305: HEADER1.2 61,84.501 61,82.8 61.301,82.499 75.413,82.499 79.125,78.787 MUX2.6
PV1-D-PK-B: HEADER1.16 MUX2.7 | length 17.6
  Top Layer w0.305: HEADER1.16 71.63,79.5 76.124,75.006 77.953,75.006 78.475,75.529 MUX2.7
"RFID RX_FPGA_OUT": HEADER1.60 HEADER1.64 | length 2
  Top Layer w0.305: HEADER1.64 HEADER1.60
RL_1: HEADER1.87 MUX1.11 | length 40.2
  Top Layer w0.305: MUX1.11 37.425,61.975 56.9,42.5 60.999,42.5 HEADER1.87
RL_2: HEADER1.91 MUX2.15 | length 38.2
  Top Layer w0.305: HEADER1.91 63.095,42.596 64.375,42.596 81.725,59.946 MUX2.15
RL_4: HEADER1.96 HEADER2.20 | length 10.8
  Signal Layer 2 w0.305: HEADER2.20 63.094,30.407 63.094,38.594 HEADER1.96
RX: HEADER1.10 MUX2.8 | length 20.9
  Top Layer w0.305: HEADER1.10 61.059,80.442 75.768,80.442 77.825,78.385 MUX2.8
SCLK-A: HEADER1.1 MUX1.6 | length 26
  Top Layer w0.305: MUX1.6 37.425,76.625 46.3,85.5 HEADER1.1
SCLK_FBR: HEADER1.70 HEADER1.72 | length 4.8
  Bottom Layer w0.305: HEADER1.70 60.955,50.546 63.046,50.546 HEADER1.72
SLOW_THRESOLD: HEADER1.75 HEADER1.77 | length 4.8
  Bottom Layer w0.305: HEADER1.77 58.988,48.489 60.988,48.489 HEADER1.75
SPARE_OUT_1: HEADER2.18 SN1.14 | length 27.5
  Top Layer w0.305: HEADER2.18 60.98,30.48 71.196,30.48 76.606,25.07 81.839,25.07 82.981,23.928 SN1.14
SPARE_OUT_2: HEADER2.22 SN1.18 | length 31.7
  Top Layer w0.305: HEADER2.22 61.186,26.314 68.555,26.314 75.794,19.075 84.277,19.075 85.521,20.319 SN1.18
SPARE_OUT_3: HEADER2.14 SN1.17 | length 30.3
  Top Layer w0.305: HEADER2.14 61.063,32.563 70.282,32.563 76.937,25.908 82.829,25.908 84.886,23.851 SN1.17
SV1-D-PK-A: HEADER1.3 MUX1.7 | length 41
  Top Layer w0.305: MUX1.7 36.775,73.775 36.2,73.2 35,73.2 34.2,74 34.2,76.4 45.9,88.1 60.5,88.1 62,86.6 HEADER1.3
SV1-D-PK-B: HEADER1.15 MUX1.15 | length 35.1
  Top Layer w0.305: MUX1.15 40.025,66.375 41.5,64.9 47.8,64.9 51.8,68.9 51.8,75.2 55.1,78.5 61,78.5 HEADER1.15
SV2-D-PK-A: HEADER1.4 MUX2.4 | length 24.6
  Top Layer w0.305: HEADER1.4 64,86.6 64.9,87.5 73.2,87.5 80.425,80.275 MUX2.4
SV3-D-PK-A: HEADER1.5 MUX1.1 | length 24.9
  Top Layer w0.305: MUX1.1 40.675,76.775 44.4,80.5 58.5,80.5 59,81 59,82.501 HEADER1.5
SV3-D-PK-B: HEADER1.20 MUX2.12 | length 20
  Top Layer w0.305: HEADER1.20 68.372,77.501 71.628,74.244 78.791,74.244 79.775,73.26 MUX2.12
SW3: HEADER1.35 HEADER1.73 | length 26.3
  Signal Layer 2 w0.305: HEADER1.73 55.372,52.129 55.372,67.005 56.772,68.405 60.905,68.405 HEADER1.35
SW4: HEADER1.47 SN1.5 | length 52
  Top Layer w0.305: SN1.5@86.792,27.895 v2(86.792,35.077)
  Bottom Layer w0.305: HEADER1.47 63.016,64.516 69.952,64.516 86.792,47.676 v2(86.792,35.077)
SW5: HEADER1.48 HEADER1.50 | length 4.8
  Top Layer w0.305: HEADER1.50 61.009,62.509 63.009,62.509 HEADER1.48
SW7: HEADER1.43 HEADER1.69 | length 19.3
  Signal Layer 2 w0.305: HEADER1.69 56.337,53.163 56.337,63.754 57.099,64.516 61.015,64.516 HEADER1.43
SW10: HEADER2.15
SW11: HEADER2.8 SN1.7 | length 27.7
  Top Layer w0.305: HEADER2.8 83.042,35.5 85.521,33.021 SN1.7
SW12: HEADER2.16 SN1.8 | length 26.9
  Top Layer w0.305: v2(84.099,32.868) 84.886,32.081 SN1.8
  Bottom Layer w0.305: HEADER2.16 68.381,31.5 70.866,33.985 82.982,33.985 v2(84.099,32.868)
SW13: HEADER2.11
SW14: HEADER2.12 SN1.9 | length 24.5
  Top Layer w0.305: HEADER2.12 81.892,33.5 84.251,31.141 SN1.9
SW15: HEADER2.19 SN1.10 | length 25.6
  Top Layer w0.305: v2(82.499,31.064) 83.616,29.947 SN1.10
  Bottom Layer w0.305: HEADER2.19 62.976,28.524 75.286,28.524 77.826,31.064 v2(82.499,31.064)
"TEMP SDA": HEADER1.49 SN1.6 | length 50.9
  Top Layer w0.305: v2(85.09,35.001) 86.156,33.935 SN1.6
  Bottom Layer w0.305: HEADER1.49 58.972,60.528 68.555,60.528 85.09,43.993 v2(85.09,35.001)
TX: HEADER1.9 MUX1.4 | length 22.9
  Top Layer w0.305: MUX1.4 38.725,76.425 43.8,81.5 HEADER1.9
V_RFID: HEADER1.46 V_RFID.2 | length 13.2
  Top Layer w0.356: V_RFID.2 50.19,62.128 50.546,62.484 58.984,62.484 HEADER1.46
VIBRATION_EN: HEADER2.21 SN1.19 | length 35.2
  Top Layer w0.305: HEADER2.21 59.872,25.629 68.199,25.629 75.514,18.313 84.557,18.313 86.156,19.913 SN1.19
VIBRATION_SCLK: HEADER2.24 SN1.16 | length 25.6
  Top Layer w0.305: HEADER2.24 68.664,27.5 76.352,19.812 83.388,19.812 84.251,20.675 SN1.16
VIBRATION_SCS: HEADER2.23 SN1.15 | length 27
  Top Layer w0.305: HEADER2.23 62.999,28.499 69.19,28.499 77.241,20.447 82.931,20.447 83.616,21.132 SN1.15
pads on no net: HEADER1.23 HEADER1.24 HEADER2.1 HEADER2.2 HEADER2.5 HEADER2.6 HEADER2.9 HEADER2.13 LDO1.4 LDO2.4 MUX1.3 MUX2.3 SW.3
copper on no net:
  other v1: 94,11
  other v3: 25,5 92,5 25,104 92,104
  other v4: 50.025,8.389 62.025,8.389 50.025,100.588 62.025,100.588

## Polygon pours and split planes (outlines as drawn)
GND on Top Layer "T" (solid, remove dead copper, pour order 0): 20,110 97,110 97,0 20,0 20,110
GND on Signal Layer 1 "G1" (solid, remove dead copper, pour order 2): 20,110 97,110 97,0 20,0 20,110
5V on Signal Layer 2 "G2" (solid, remove dead copper, pour order 4): 20,110 97,110 97,0 20,0 20,110
GND on Signal Layer 4 "G4" (solid, remove dead copper, pour order 6): 20,110 97,110 97,0 20,0 20,110
GND on Bottom Layer "B" (solid, remove dead copper, pour order 8): 20,110 97,110 97,0 20,0 20,110
3V3 on Signal Layer 3 "G3" (solid, remove dead copper, pour order 12): 20,110 97,110 97,0 20,0 20,110

## Silkscreen, mask and mechanical layers (free items; w line width, h text height)
Top Overlay:
  drawing of 5906 lines, arcs and shapes, not listed
  text "FPGA Board  / Tester" at 23.698,87.706 h4
  text "ON/OFF" at 44.806,32.842 h2.5 r90
  text "GND" at 27.788,27 h2
  text "12V" at 34.5,27 h2
Mechanical 10:
  lines w0.04: 20,5 ccw(c25,5) 25,0 30,0 90,0 92,0 ccw(c92,5) 97,5 97,104 ccw(c92,104) 92,109 90,109 30,109 25,109 ccw(c25,104) 20,104 20,5

## Text inside footprints (layer, text, board x,y; h text height)
SN1: Mechanical 13 "*" at 88.861,27.12 h1.27 r270